# Altium PCB RemoteCntrl_1R1.PcbDoc
Units mm, origin at the board's own origin, x right, y up, seen from the top; angles counter-clockwise.
Board outline 110 x 58 mm, 2 copper layers (Top Layer, Bottom Layer); 29 components, 23 nets, 115 pads, 26 vias.
Unrouted connection lines stored in the file: 2.
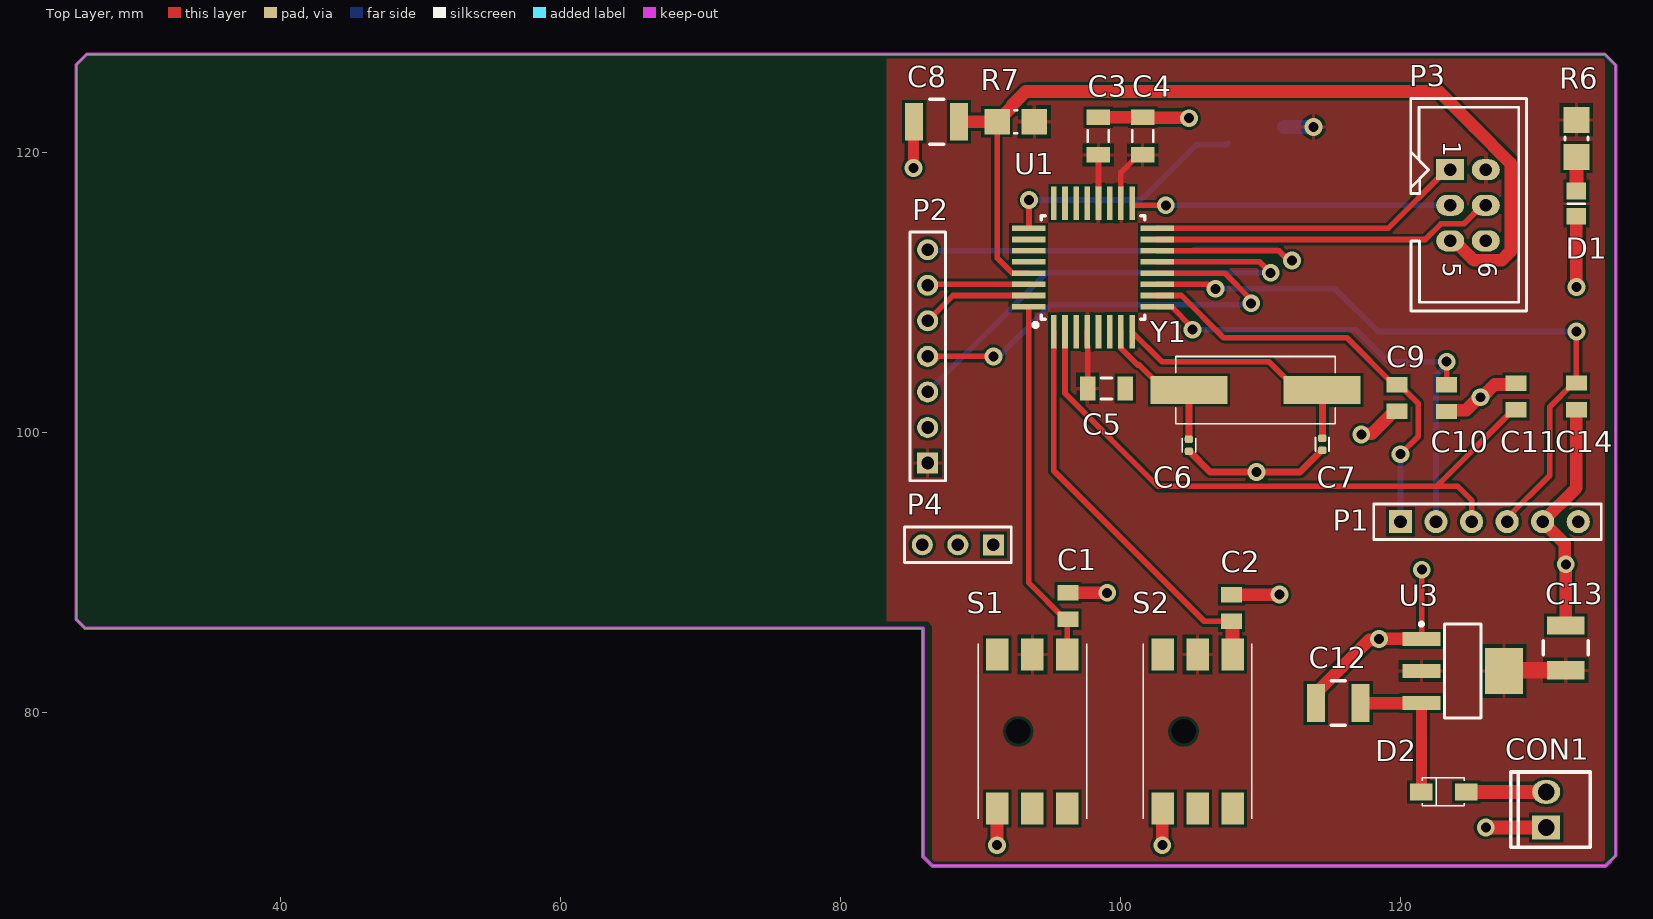
[diagram p0: Top Layer view]
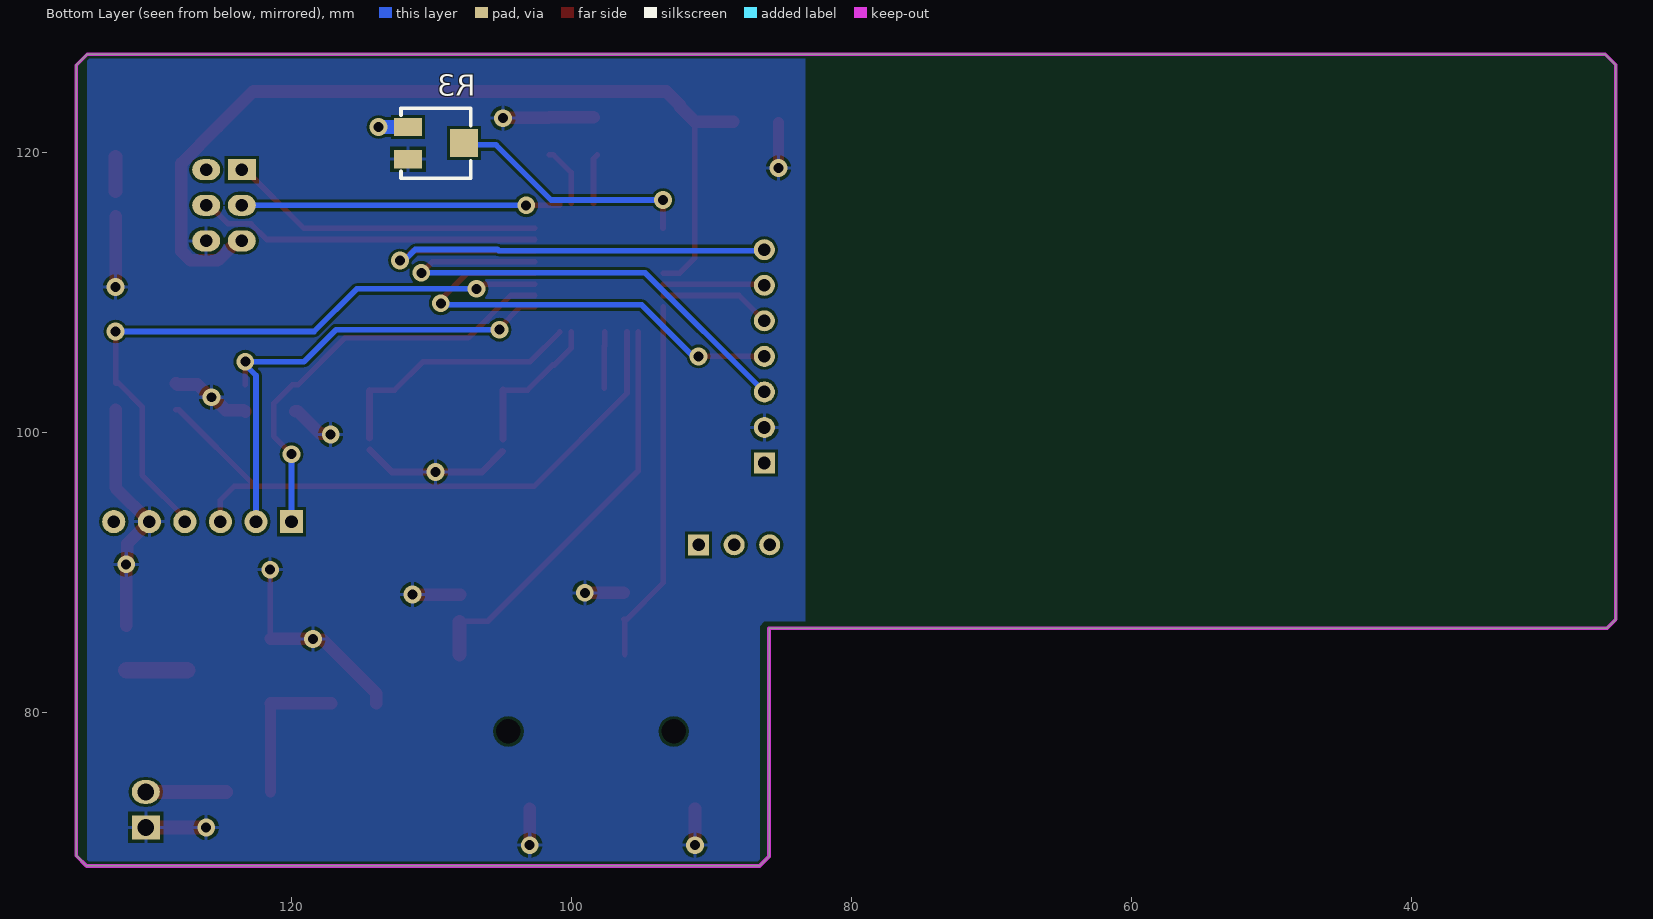
[diagram p1: Bottom Layer view, seen from below]

## Layer stack, top to bottom
Top Solder: solder mask 0.0102, Solder Resist, Dk 3.5
Top Layer: signal copper 0.0356
Dielectric 1: dielectric 0.32, FR-4, Dk 4.8
Bottom Layer: signal copper 0.0356
Bottom Solder: solder mask 0.0102, Solder Resist, Dk 3.5

## Board outline
26.014,86 25.4,86.614 25.4,126.238 26.162,127 134.62,127 135.4,126.22 135.4,69.741 134.659,69 86.575,69 85.9,69.675 85.9,86

## Design rules (kind name [scope] priority, off if disabled: settings)
Clearance [All] p1: gap=0.2 ignorepadtopadclearanceinfootprint=FALSE
PolygonConnect [All] p1: connectstyle=Relief reliefconductorwidth=0.254 reliefentries=4 polygonreliefangle="90 Angle" airgapwidth=0.254
RoutingVias [All] p1: holewidth=0.711 width=1.27 viastyle="Through Hole" minholewidth=0.711 minwidth=1.27 maxholewidth=0.711 maxwidth=1.27
SolderMaskExpansion [All] p1: expansion=0.102 istentingtop=FALSE
Width [All] p1: maxlimit=1.2 minlimit=0.4 preferedwidth=0.4 checkconnectedcopper=TRUE
30 further rules are at their usual default settings.

## Components (designator, comment, footprint, x,y, rotation, side; value= is the part's Value field where it differs from the comment)
C1 "Capacitor 0805" C0805 96.266,87.569 r270 top
C2 "Capacitor 0805" C0805 107.95,87.437 r270 top
C3 "100n" C1206 98.425,121.158 r270 top value=100nF/100V
C4 "100n" C1206 101.6,121.158 r270 top value=100nF/100V
C5 "100n" C1206 99.013,103.124 r180 top value=100nF/100V
C6 "18p" CAPC1005X55N 104.902,99.06 r270 top
C7 "18p" CAPC1005X55N 114.427,99.138 r270 top
C8 "100n" C1210 86.868,122.174 r0 top
C9 "1u" C0805 119.761,102.428 r90 top
C10 "1u" C0805 123.317,102.423 r90 top
C11 "1u" C0805 128.27,102.55 r270 top
C12 "1u" C1210 115.57,80.645 r0 top value=2200nF/100V
C13 "4.7u" C1210 131.826,84.582 r270 top value=2200nF/100V
C14 "1u" C0805 132.588,102.555 r90 top
CON1 "Header 2X1" HDR2X1_2P54 130.429,71.755 r180 top
D1 "LED" R0805 132.588,116.321 r270 top
D2 "1N4148W-7-F" SOD123 123.063,74.295 r180 top
P1 "Header 6X1" HDR6X1_2P54 120.015,93.599 r0 top
P2 "Header 7" HDR1X7 86.233,97.79 r90 top
P3 "HDR3X2" HDR2X3_2P54 123.571,118.745 r270 top
P4 "Header 3" HDR1X3 90.932,91.948 r180 top
R3 "RPot SM" POT4MM-2 109.696,120.65 r180 bottom
R6 "250R" R1206 132.588,120.976 r90 top
R7 "10k" R1206 92.528,122.174 r0 top
S1 "ESB-33535A" ESB33535A 93.71,78.613 r270 top
S2 "ESB-33535A" ESB33535A 105.521,78.613 r270 top
U1 "ATMega328PB" TQFP32 98.044,111.76 r90 top
U3 "LDL1117S33R" SOT223L 124.46,82.931 r0 top value=3.3V/1.2A
Y1 "8MHz" XTAL_ECS-80-18-5PX-TR 109.652,102.997 r0 top

## Footprints (in the part's own frame and the unit in brackets; to place one, negate y for a bottom-side part, rotate by r counter-clockwise, add the part's x,y. Pads: shape width x height; smd on the part's side, far side on the other; paste and mask are expansions set on the pad)
C0805 [mm]
  rect 1.1x1.5 smd: 1(-0.95,0) 2(0.95,0)
  body extent -1.1,-0.72 1.1,0.72, height 1.1
C1206 [mm] "Chip Capacitor, Body 3.2x1.6mm, IPC High Density"
  rect 1.1x1.7 smd: 1(-1.35,0) 2(1.35,0)
  silkscreen extent -0.4,-0.75 0.4,0.75, body extent -1.6,-0.8 1.6,0.8, height 1.5
C1210 [mm]
  rect 1.3x2.7 smd: 1(-1.6,0) 2(1.6,0)
  silkscreen extent -0.5,-1.6 0.5,1.6, body extent -1.8,-1.4 1.8,1.4, height 1.24
CAPC1005X55N [mm]
  rrect53% 0.54x0.6 smd: 1(-0.43,0) 2(0.43,0)
  silkscreen extent -0.5,-0.48 0.5,0.48
ESB33535A [mm]
  rect 2.3x1.6 smd: 1(-5.5,2.5) 2(-5.5,0) 3(-5.5,-2.5) 4(5.5,-2.5) 5(5.5,0) 6(5.5,2.5)
  round 0.875 hole 1.75 unplated: MH1(0,-1)
  silkscreen extent -6.25,-3.88 6.25,3.88, body extent -6.49,-3.88 6.49,3.88, height 12.6
HDR1X3 [mm] "Connector; Header; 3 Position"
  rect 1.5x1.5 hole 0.9: 1(0,0)
  round 1.5 hole 0.9: 2(2.54,0) 3(5.08,0)
  silkscreen extent -1.27,-1.27 6.35,1.27
HDR1X7 [mm] "Connector; Header; 7 Position"
  rect 1.5x1.5 hole 0.9: 1(0,0)
  round 1.5 hole 0.9: 2(2.54,0) 3(5.08,0) 4(7.62,0) 5(10.16,0) 6(12.7,0) 7(15.24,0)
  silkscreen extent -1.27,-1.27 16.51,1.27
HDR2X1_2P54 [mm] "Polarised Header 2 way"
  rect 2x1.7 hole 1.2: 1(0,0)
  oval 2x1.7 hole 1.2: 2(0,-2.54)
  silkscreen extent -3.16,-3.96 2.54,1.42, body extent -3.3,-3.64 3.17,1.44, height 7.39
HDR2X3_2P54 [mm] "IDC 3X2 Way 2.54 pitch"
  rect 1.5x2 hole 0.9: 1(0,0)
  oval 1.5x2 hole 0.9 paste+0: 2(0,2.54)
  oval 1.5x2 hole 0.9: 3(2.54,0) 4(2.54,2.54) 5(5.08,0) 6(5.08,2.54)
  silkscreen extent -5.1,-2.82 10.1,5.45, body extent -5.07,-3.17 10.17,6.28, height 9.1
HDR6X1_2P54 [mil] "Connector for BLE"
  rect 65x65 hole 35.43: 1(0,0)
  round 65 hole 35.43: 2(100,0) 3(200,0) 4(300,0) 5(400,0) 6(500,0)
  silkscreen extent -75,-50 565,50, body extent -55,-50 545,50, height 334
POT4MM-2 [mm] "Square Trimming Potentiometer"
  rect 2x1.3 smd: CCW(-2,-1.15) CW(-2,1.15)
  rect 2x2 smd: W(2,0)
  silkscreen extent -2.5,-2.5 2.5,2.5
R0805 [mm]
  rect 1.2x1.4 smd: 1(-0.9,0) 2(0.9,0)
  silkscreen extent 0,-0.6 0,0.6, body extent -1.07,-0.7 1.07,0.7, height 0.65
R1206 [mm] "Chip Resistor, 2-Leads, Body 3.20x1.60mm, IPC Low Density"
  rect 1.85x1.85 smd: 1(-1.325,0) 2(1.325,0)
  silkscreen extent -0.1,-0.82 0.1,0.82, body extent -1.7,-0.87 1.7,0.87, height 0.65
SOD123 [mm] "SOD-123; 2 Leads; Body 2.7 x 1.6 mm, (LxW)"
  rect 1.6x1.2 smd: 1(-1.65,0) 2(1.55,0)
  silkscreen extent -1.5,-1 1.5,1, body extent -1.8,-0.86 1.8,0.86, height 1.21
SOT223L [mm] "SOT223/SC73, 4-Leads, Body 6.5x3.5mm, Pitch 2.3mm, Lead Span 7mm, IPC Low Density"
  rect 2.7x1 smd: 1(-2.95,2.3) 2(-2.95,0) 3(-2.95,-2.3)
  rect 2.7x3.3 smd: 2(2.95,0)
  silkscreen extent -3.07,-3.35 1.3,3.47, body extent -3.65,-3.35 3.65,3.35, height 1.83
TQFP32 [mm]
  rect 2.4x0.4 smd: 1(-4.6,2.8) 2(-4.6,2) 3(-4.6,1.2) 4(-4.6,0.4) 5(-4.6,-0.4) 6(-4.6,-1.2) 7(-4.6,-2) 8(-4.6,-2.8) 17(4.6,-2.8) 18(4.6,-2) 19(4.6,-1.2) 20(4.6,-0.4) 21(4.6,0.4) 22(4.6,1.2) 23(4.6,2) 24(4.6,2.8)
  rect 0.4x2.4 smd: 9(-2.8,-4.6) 10(-2,-4.6) 11(-1.2,-4.6) 12(-0.4,-4.6) 13(0.4,-4.6) 14(1.2,-4.6) 15(2,-4.6) 16(2.8,-4.6) 25(2.8,4.6) 26(2,4.6) 27(1.2,4.6) 28(0.4,4.6) 29(-0.4,4.6) 30(-1.2,4.6) 31(-2,4.6) 32(-2.8,4.6)
  silkscreen extent -4.24,-3.7 3.7,4.24, body extent -3.5,-3.5 3.5,3.5, height 1.3
XTAL_ECS-80-18-5PX-TR [mm]
  rect 5.5x2 smd: 1(-4.75,0) 2(4.75,0)
  silkscreen extent -5.7,-2.4 5.7,2.4

## Part data
C1 C2 C9 C10 C11 C14: library part CCAP0805, "CCAP0805"
C3 C4 C5: library part "Cap CER Decoup C3216C0G2A104J160AC", "CAP CER 0.1UF 100V C0G 1206", Manufacturer="TDK Corporation", MPN=C3216C0G2A104J160AC, Supplier Part Number 1=1795799, Part Description="CAP CER 0.1UF 100V C0G 1206", Supplier 1=RSComponents, Supplier 2=Element14, Supplier 3=Digi-Key, Supplier 4=Mouser, Supplier Part Number 2=2906828, Supplier Part Number 3=445-172677-1-ND, Supplier Part Number 4=810-C3216C0G2A104J6C, Type="Surface mount"
C6 C7: library part CBR04C809B5GAC, "CAP CER 8PF 50V NP0 0402", Package=None, Availability=Unavailable, MP=CBR04C809B5GAC, Price=None
C8: library part CCAP1210, "CCAP1210"
C12 C13: library part "Cap CER HF DC-Link CL32B225KCJSNNE", "CAP CER 2.2UF 100V X7R 1210", Manufacturer="AVX Corporation", MPN=CL32B225KCJSNNE, Supplier Part Number 1=1276-3362-1-ND, Part Description="CAP CER 2.2UF 100V X7R 1210", Supplier 1=Digi-Key, Supplier 2=Arrow, Type="Surface mount"
CON1: library part HDR2X1
D2: library part 1N4148_SMT_SOD123, "DIODE GEN PURP 100V 300MA SOD123", Base Part Number=1N4148W, Capacitance @ Vr, F="2pF @ 0V, 1MHz", Current - Average Rectified (Io)=150mA, Manufacturer="Diodes Incorporated", Manufacturer Part Number=1N4148W-13-F, Operating Temperature - Junction="-65°C ~ 150°C", Package / Case=SOD-123, Supplier Part Number 1=1N4148W-13FDICT-ND, Category="Discrete Semiconductor Products", ComponentLink1Description=https://www.diodes.com/assets/Datasheets/ds30086.pdf, ComponentLink1URL=https://www.diodes.com/assets/Datasheets/ds30086.pdf, Diode Type=Standard, Mounting Type="Surface Mount", Packaging="Cut Tape (CT)", Part Status=Active, Pricing 1="1=0.33, 10=0.292, 100=0.1586, 500=0.0976, 1000=0.06656 (NZD)", RoHS="RoHS Compliant", Speed="Small Signal =< 200mA (Io), Any Speed", Stock 1=5282, Supplier 1=Digi-Key, Supplier Device Package=SOD-123
P1: library part HDR6X1, "Header, 6-Pin", LatestRevisionDate=17-Jul-2002, LatestRevisionNote="Re-released for DXP Platform.", Publisher="Altium Limited"
P2: "Header, 7-Pin", LatestRevisionDate=17-Jul-2002, LatestRevisionNote="Re-released for DXP Platform.", Publisher="Altium Limited"
P3: "Header, 3-Pin, Dual row"
P4: "Header, 3-Pin", LatestRevisionDate=17-Jul-2002, LatestRevisionNote="Re-released for DXP Platform.", Publisher="Altium Limited"
R3: "Square Trimming Potentiometer", ComponentLink1Description="Manufacturer Link", ComponentLink1URL=http://bourns.com/2/search.html, DatasheetVersion=Oct-2003, PackageDescription="Square Trimming Potentiometer", PackageReference=POT4MM-2, Published=17-Dec-2003, Publisher="Altium Limited"
R6 R7: library part RES1206, "RES1206"
S1 S2: "Switch", Manufacturer_Name=Panasonic, Mouser Part Number=667-ESB-33535A, Arrow Part Number=ESB-33535A, Arrow Price/Stock=https://www.arrow.com/en/products/esb-33535a/panasonic, Datasheet Link=https://industrial.panasonic.com/ac/cdn/e/control/switch/push/catalog/sw_pu_eng_esb33.pdf, Height=12.5mm, Manufacturer_Part_Number=ESB-33535A, Mouser Price/Stock=https://www.mouser.co.uk/ProductDetail/Panasonic/ESB-33535A?qs=bhLVwANLX8NKx9UGCqkFcQ%3D%3D
U1: "IC MCU 8BIT 32KB FLASH 32TQFP", Supplier Part Number 1=ATMEGA328PB-AU-ND, Supplier 1=Digi-Key, Supplier 2=Digikey, Supplier Part Number 2=ATMEGA328PB-AU-ND
U3: library part "LDO LDL1117S33R", "IC REG LINEAR 3.3V 1.2A SOT223", Manufacturer=STMicroelectronics, Supplier Part Number 1=2729708, MPN=LDL1117S33R, Part Description="IC REG LINEAR 3.3V 1.2A SOT223", Supplier 1=Element14, Supplier 2=Digi-Key, Supplier 3=Mouser, Supplier Part Number 2=497-17239-1-ND, Supplier Part Number 3=511-LDL1117S33R, Type="Surface mount"
Y1: library part ECS-80-18-5PX-TR, "8MHz Â±30ppm Crystal 18pF 60 Ohms HC-49/US", Package="HC49/US ECS International", Digi-Key_Part_Number=XC1271CT-ND, Digi-Key_Purchase_URL=https://www.digikey.com/product-detail/en/ecs-inc/ECS-80-18-5PX-TR/XC1271CT-ND/827735?utm_source=snapeda&utm_medium=aggregator&utm_campaign=symbol, MF="ECS Inc.", MP=ECS-80-18-5PX-TR, SnapEDA_Link=https://www.snapeda.com/parts/ECS-80-18-5PX-TR/ECS%20Inc./view-part/470513/?ref=snap

## Via types
v1: diameter 1.27, hole 0.711, Top Layer to Bottom Layer, 26 vias

## Nets (pads, with @x,y where several pads share a name; then routed paths per layer and width w, separated by ;. In a path a pad name is that pad's centre, name@x,y a point inside that pad or via, vN(x,y) a via of type N, cw(c..) or ccw(c..) an arc to the next point about the centre after c; other vN are vias at no path point)
3V3: C3.2 C4.2 C5.2 C13.2 P2.1 P3.2 R3.CW R6.2 R7.2 S1.2 S2.2 U1.4 U1.18 U1.20 U3.2 | length 18.4
  Top Layer w0.4: U1.4 97.644,106.16 97.663,106.141 C5.2 ; C3.2@98.171,119.808 98.444,119.535 U1.20 ; U1.18 100.044,118.552 101.3,119.808 C4.2 ; U3.2@127.41,82.931 U3.2@127.461,82.982
  Top Layer w1.2: U3.2@127.461,82.982 C13.2
  Bottom Layer w0.4: R3.CW R3.CW@111.703,121.793
  Bottom Layer w1: R3.CW@111.703,121.793 v1(113.792,121.793)
9V: CON1.2 D2.1 | length 5.7
  Top Layer w1: D2.1 CON1.2
BLE_RESET: P2.7 U1.14 | length 36.3
  Top Layer w0.4: U1.14 111.341,112.96 112.033,112.268 v1(112.268,112.268)
  Bottom Layer w0.4: P2.7 86.296,112.966 105.219,112.966 105.302,113.049 111.173,113.049 111.954,112.268 v1(112.268,112.268)
GND: C1.1 C2.1 C3.1 C4.1 C5.1 C6.2 C7.2 C8.1 C9.1 C10.1 C11.1 C12.1 C13.1 C14.1 CON1.1 D1.2 P1.5 P2.2 P3.6 R3.CCW S1.4 S2.4 U3.1 | length 82.4
  Top Layer w0.4: C8.1@85.217,122.123 C8.1 ; S1.4@91.186,73.089 S1.4 ; S2.4@102.997,73.089 S2.4 ; C6.2 C6.2@104.932,98.63 ; C2.1 C2.1@107.952,88.39 ; v1@111.377,88.39 v1(111.379,88.392) ; C7.2@114.397,98.708 C7.2 ; v1(118.491,85.217) v1@118.498,85.224 ; U3.1@121.503,85.224 U3.1 121.539,85.26 v1(121.539,90.17)
  Top Layer w0.5: C6.2@104.932,98.63 106.407,97.155 v1(109.728,97.155) 112.844,97.155 C7.2@114.397,98.708
  Top Layer w0.8: v1(85.217,118.872) C8.1@85.217,122.123
  Top Layer w0.9: v1(91.186,70.485) S1.4@91.186,73.089 ; C1.1 v1(99.06,88.519) ; C3.1 C4.1 101.64,122.468 104.862,122.468 v1(104.902,122.428) ; v1(102.997,70.485) S2.4@102.997,73.089 ; C2.1@107.952,88.39 v1@111.377,88.39 ; C12.1 113.97,81.345 117.771,85.146 118.42,85.146 v1(118.491,85.217) ; v1(117.221,99.822) 117.292,99.893 117.976,99.893 119.561,101.478 C9.1 ; v1@118.498,85.224 U3.1@121.503,85.224 ; C10.1 123.417,101.573 124.714,101.573 125.63,102.489 v1(125.73,102.489) 125.83,102.489 126.741,103.4 128.17,103.4 C11.1 ; C13.1 v1(131.826,90.551) 131.755,90.622 131.755,92.019 P1.5 132.588,96.012 C14.1 ; v1(132.588,110.363) D1.2
  Top Layer w1: v1(126.111,71.755) CON1.1
HOST_CTS: P2.4 U1.12 | length 32.8
  Top Layer w0.4: P2.4 86.614,105.029 86.995,105.41 v1(90.932,105.41) ; U1.12 107.461,111.36 109.347,109.474 v1(109.347,109.201)
  Bottom Layer w0.4: v1(90.932,105.41) 91.313,105.41 94.996,109.093 109.239,109.093 v1(109.347,109.201)
HOST_RTS: P2.3 U1.13 | length 36.5
  Top Layer w0.4: U1.13 109.963,112.16 v1(110.744,111.379)
  Bottom Layer w0.4: P2.3 94.742,111.379 v1(110.744,111.379)
HOST_RX: P2.6 U1.30 | length 7.2
  Top Layer w0.4: P2.6 86.303,110.56 U1.30
HOST_TX: P2.5 U1.31 | length 8
  Top Layer w0.4: P2.5 88.043,109.76 U1.31
MISO: P3.1 U1.16 | length 22.7
  Top Layer w0.4: U1.16 119.136,114.56 123.321,118.745 P3.1
MOSI: P3.4 U1.15 | length 24.5
  Top Layer w0.4: U1.15 121.79,113.76 122.907,114.877 124.533,114.877 125.861,116.205 P3.4
NetC12_2: C12.2 D2.2 U3.3 | length 10.7
  Top Layer w0.4: C12.2 C12.2@117.184,80.631 ; U3.3 U3.3@121.513,80.628
  Top Layer w0.8: D2.2 U3.3@121.513,80.628
  Top Layer w0.9: C12.2@117.184,80.631 U3.3
NetD1_1: D1.1 R6.1 | length 2.4
  Top Layer w1: D1.1 R6.1
RESET: C8.2 P3.5 R7.1 U1.29 | length 66.4
  Top Layer w0.4: R7.1 91.203,112.435 92.278,111.36 U1.29
  Top Layer w0.9: C8.2 R7.1 92.278,123.249 92.278,123.368 93.243,124.333 122.753,124.333 125.257,121.829 127.889,119.197 127.889,112.922 127.232,112.265 125.281,112.265 123.881,113.665 P3.5
SCK: P3.3 U1.17 | length 22.9
  Top Layer w0.4: U1.17 100.844,116.205 v1(103.251,116.205)
  Bottom Layer w0.4: v1(103.251,116.205) P3.3
V_ACCEL_1: C9.2 P1.1 U1.10 | length 30.8
  Top Layer w0.4: U1.10 104.362,109.76 107.378,106.744 116.195,106.744 119.561,103.378 C9.2 119.961,103.378 121.285,102.054 121.285,99.695 v1(120.015,98.425)
  Bottom Layer w0.4: P1.1 v1(120.015,98.425)
V_ACCEL_2: C10.2 P1.2 U1.9 | length 35.8
  Top Layer w0.4: U1.9 103.644,108.96 105.156,107.448 v1(105.156,107.315) ; C10.2 v1(123.317,105.029)
  Bottom Layer w0.4: v1(105.156,107.315) 116.84,107.315 119.126,105.029 v1(123.317,105.029) 123.317,104.806 122.555,104.044 P1.2
V_ACCEL_3: C11.2 P1.3 U1.2 | length 46.1
  Top Layer w0.4: U1.2 96.044,102.777 102.701,96.12 122.59,96.12 ; P1.3 125.095,95.143 124.118,96.12 122.59,96.12 ; C11.2 128.07,101.6 122.59,96.12
V_ACCEL_4: C14.2 P1.4 U1.11 | length 47.1
  Top Layer w0.4: U1.11 106.248,110.56 106.572,110.236 v1(106.807,110.236) ; P1.4 127.635,93.853 130.683,96.901 130.683,101.8 132.388,103.505 C14.2 v1(132.588,107.188)
  Bottom Layer w0.4: v1(106.807,110.236) 115.358,110.236 118.406,107.188 v1(132.588,107.188)
V_MV_BWD: C2.2 S2.1 U1.1 | length 29.5
  Top Layer w0.4: U1.1 95.244,97.24 105.997,86.487 C2.2 C2.2@108.021,86.416
  Top Layer w1: S2.1 C2.2@108.021,86.416
V_MV_FWD: C1.2 S1.1 U1.32 | length 26.2
  Top Layer w0.4: U1.32 93.444,89.241 96.066,86.619 C1.2 96.21,86.563 S1.1
V_STR_CTRL: R3.W U1.25 | length 18
  Top Layer w0.4: U1.25 93.472,114.56 v1(93.472,116.586)
  Bottom Layer w0.4: v1(93.472,116.586) 101.473,116.586 105.41,120.523 107.569,120.523 R3.W
X1: C6.1 U1.7 Y1.1 | length 10.8
  Top Layer w0.4: U1.7 100.044,105.994 101.243,104.796 101.353,104.796 103.152,102.997 Y1.1
  Top Layer w0.5: C6.1 Y1.1
X2: C7.1 U1.8 Y1.2 | length 18.7
  Top Layer w0.4: U1.8 102.975,105.029 110.62,105.029 112.652,102.997 Y1.2 Y1.2@114.427,102.972
  Top Layer w0.5: C7.1 Y1.2@114.427,102.972
pads on no net: P1.6 P4.1 P4.2 P4.3 S1.3 S1.5 S1.6 S1.MH1 S2.3 S2.5 S2.6 S2.MH1 U1.3 U1.5 U1.6 U1.19 U1.21 U1.22 U1.23 U1.24 U1.26 U1.27 U1.28

## Polygon pours and split planes (outlines as drawn)
GND on Bottom Layer "GND_L02_P001" (solid, pour order 1): 83.439,127 134.62,127 134.62,69.039 134.659,69 86.575,69 86.575,86.145 86.233,86.487 83.312,86.487 83.312,126.873
3V3 on Top Layer "3V3_L01_P000" (solid, pour order 0): 83.439,127 134.62,127 134.62,69.039 134.659,69 86.575,69 86.575,86.145 86.233,86.487 83.312,86.487 83.312,126.873

## Keep-outs
Keep-Out Layer:
  the board outline again, w0.254

## Text inside footprints (layer, text, board x,y; h text height)
P3: Top Overlay "6" at 125.603,112.141 h1.27 r270; Top Overlay "5" at 123.063,112.141 h1.27 r270; Top Overlay "1" at 123.063,120.777 h1.27 r270